# Altium PCB ap-pam-v4.PcbDoc (part 2 of 2)
Units mm, origin at the board's own origin, x right, y up, seen from the top; angles counter-clockwise.
Board outline 190.5 x 50.8 mm, 2 copper layers (Top Layer, Bottom Layer), stack 0.579 mm thick; 55 components, 33 nets, 351 pads, 1124 vias.
Unrouted connection lines stored in the file: 1.
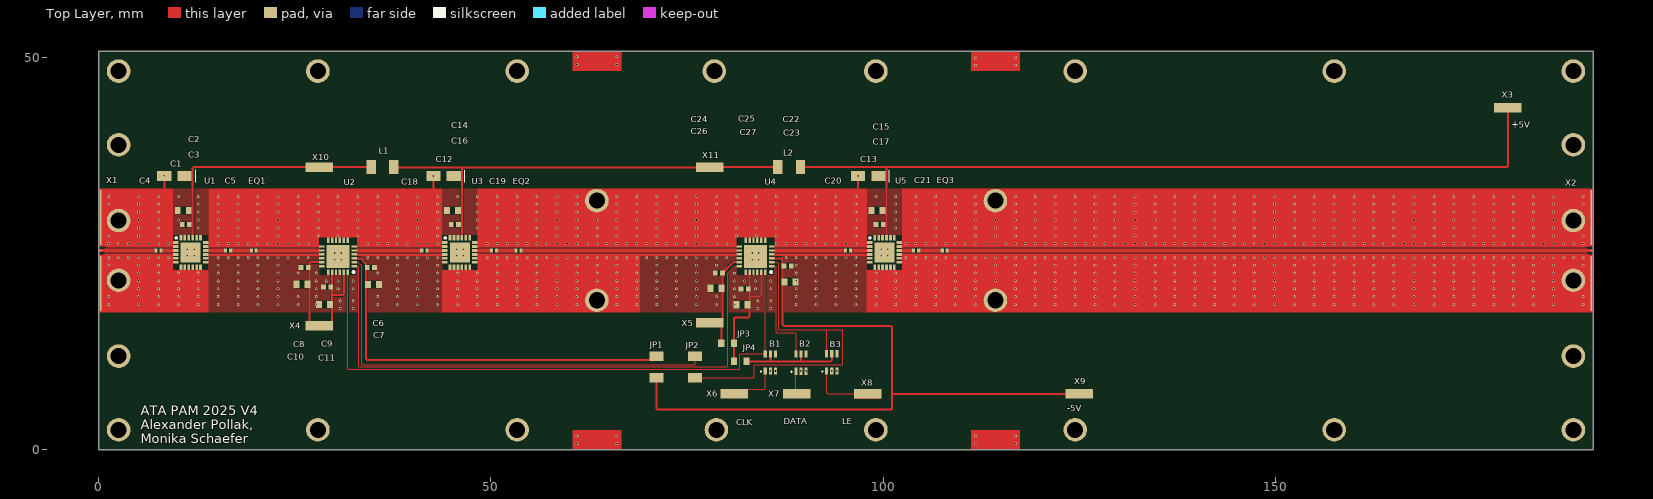
[diagram p0: Top Layer view]

## Silkscreen, mask and mechanical layers (free items; w line width, h text height) (continued)
Top Overlay: (continued)
  text "DATA" at 87.336,3.221 h0.8
  text "CLK" at 81.251,3.142 h0.8
  text "ATA PAM 2025 V4 / Alexander Pollak, / Monika Schaefer" at 5.368,0.814 h1.2
Top Solder:
  circle w1.5: c114.3,19.05 r0.75
  circle w1.5: c114.3,31.75 r0.75
  circle w1.5: c63.5,19.05 r0.75
  circle w1.5: c187.96,29.21 r0.75
  circle w1.5: c187.96,21.59 r0.75
  circle w1.5: c2.54,21.59 r0.75
  circle w1.5: c63.5,31.75 r0.75
  circle w1.5: c2.54,29.21 r0.75
  circle w1.5: c187.96,11.938 r0.75
  circle w1.5: c187.96,2.54 r0.75
  circle w1.5: c78.47,48.26 r0.75
  circle w1.5: c78.74,2.54 r0.75
  circle w1.5: c27.94,48.26 r0.75
  circle w1.5: c27.94,2.54 r0.75
  circle w1.5: c124.46,2.54 r0.75
  circle w1.5: c124.46,48.26 r0.75
  circle w1.5: c157.48,48.26 r0.75
  circle w1.5: c157.48,2.54 r0.75
  circle w1.5: c2.54,11.938 r0.75
  circle w1.5: c2.54,2.54 r0.75
  circle w1.5: c2.54,48.26 r0.75
  circle w1.5: c2.54,38.862 r0.75
  circle w1.5: c187.96,38.862 r0.75
  circle w1.5: c187.96,48.26 r0.75
  circle w1.5: c99.06,2.54 r0.75
  circle w1.5: c99.06,48.26 r0.75
  circle w1.5: c53.34,2.54 r0.75
  circle w1.5: c53.34,48.26 r0.75
  region: 0,0 190.5,0 190.5,50.8 0,50.8
Bottom Solder:
  circle w1.5: c114.3,19.05 r0.75
  circle w1.5: c114.3,31.75 r0.75
  circle w1.5: c63.5,19.05 r0.75
  circle w1.5: c187.96,29.21 r0.75
  circle w1.5: c187.96,21.59 r0.75
  circle w1.5: c2.54,21.59 r0.75
  circle w1.5: c63.5,31.75 r0.75
  circle w1.5: c2.54,29.21 r0.75
  circle w1.5: c187.96,11.938 r0.75
  circle w1.5: c187.96,2.54 r0.75
  circle w1.5: c78.47,48.26 r0.75
  circle w1.5: c78.74,2.54 r0.75
  circle w1.5: c27.94,48.26 r0.75
  circle w1.5: c27.94,2.54 r0.75
  circle w1.5: c124.46,2.54 r0.75
  circle w1.5: c124.46,48.26 r0.75
  circle w1.5: c157.48,48.26 r0.75
  circle w1.5: c157.48,2.54 r0.75
  circle w1.5: c2.54,11.938 r0.75
  circle w1.5: c2.54,2.54 r0.75
  circle w1.5: c2.54,48.26 r0.75
  circle w1.5: c2.54,38.862 r0.75
  circle w1.5: c187.96,38.862 r0.75
  circle w1.5: c187.96,48.26 r0.75
  circle w1.5: c99.06,2.54 r0.75
  circle w1.5: c99.06,48.26 r0.75
  circle w1.5: c53.34,2.54 r0.75
  circle w1.5: c53.34,48.26 r0.75
  region: 0,0 190.5,0 190.5,50.8 0,50.8
Board:
  the board outline again, w0.2